# Altium PCB Group_2.PcbDoc (part 1 of 2)
Units mil, origin at the board's own origin, x right, y up, seen from the top; angles counter-clockwise.
Board outline 3460 x 5000 mil, 2 copper layers (Top Layer, Bottom Layer); 164 components, 77 nets, 434 pads, 114 vias.
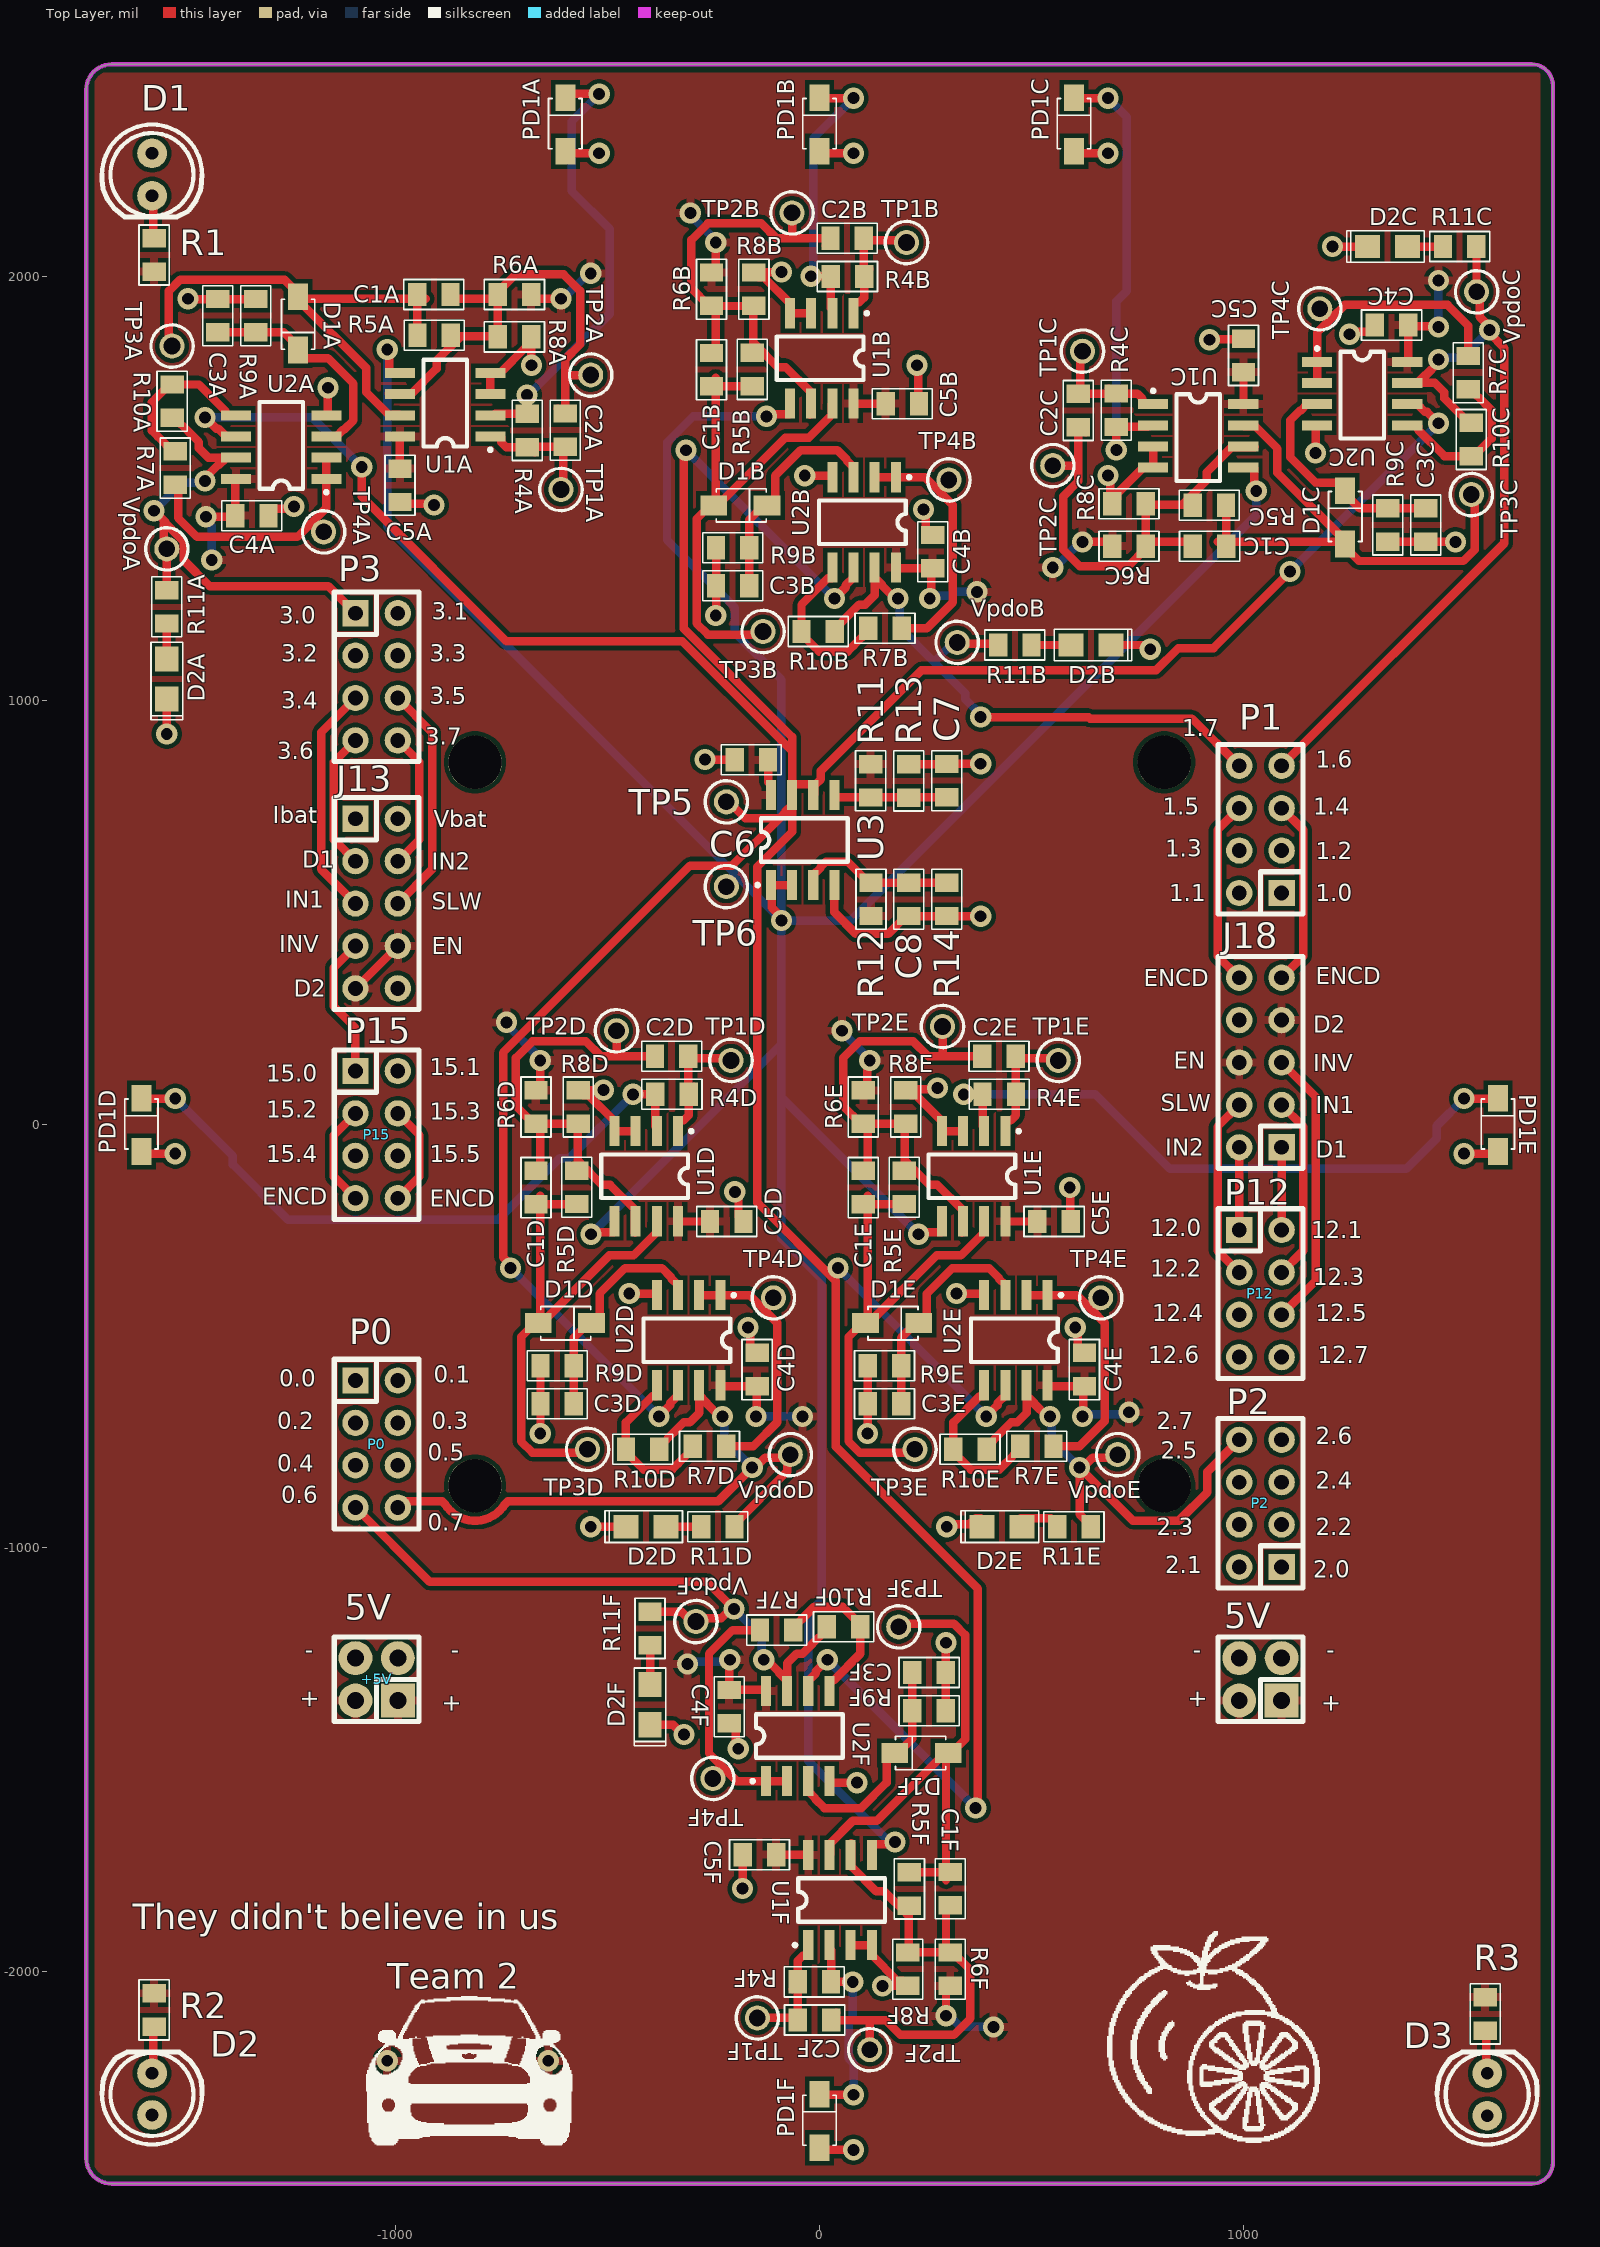
[diagram p0: Top Layer view]
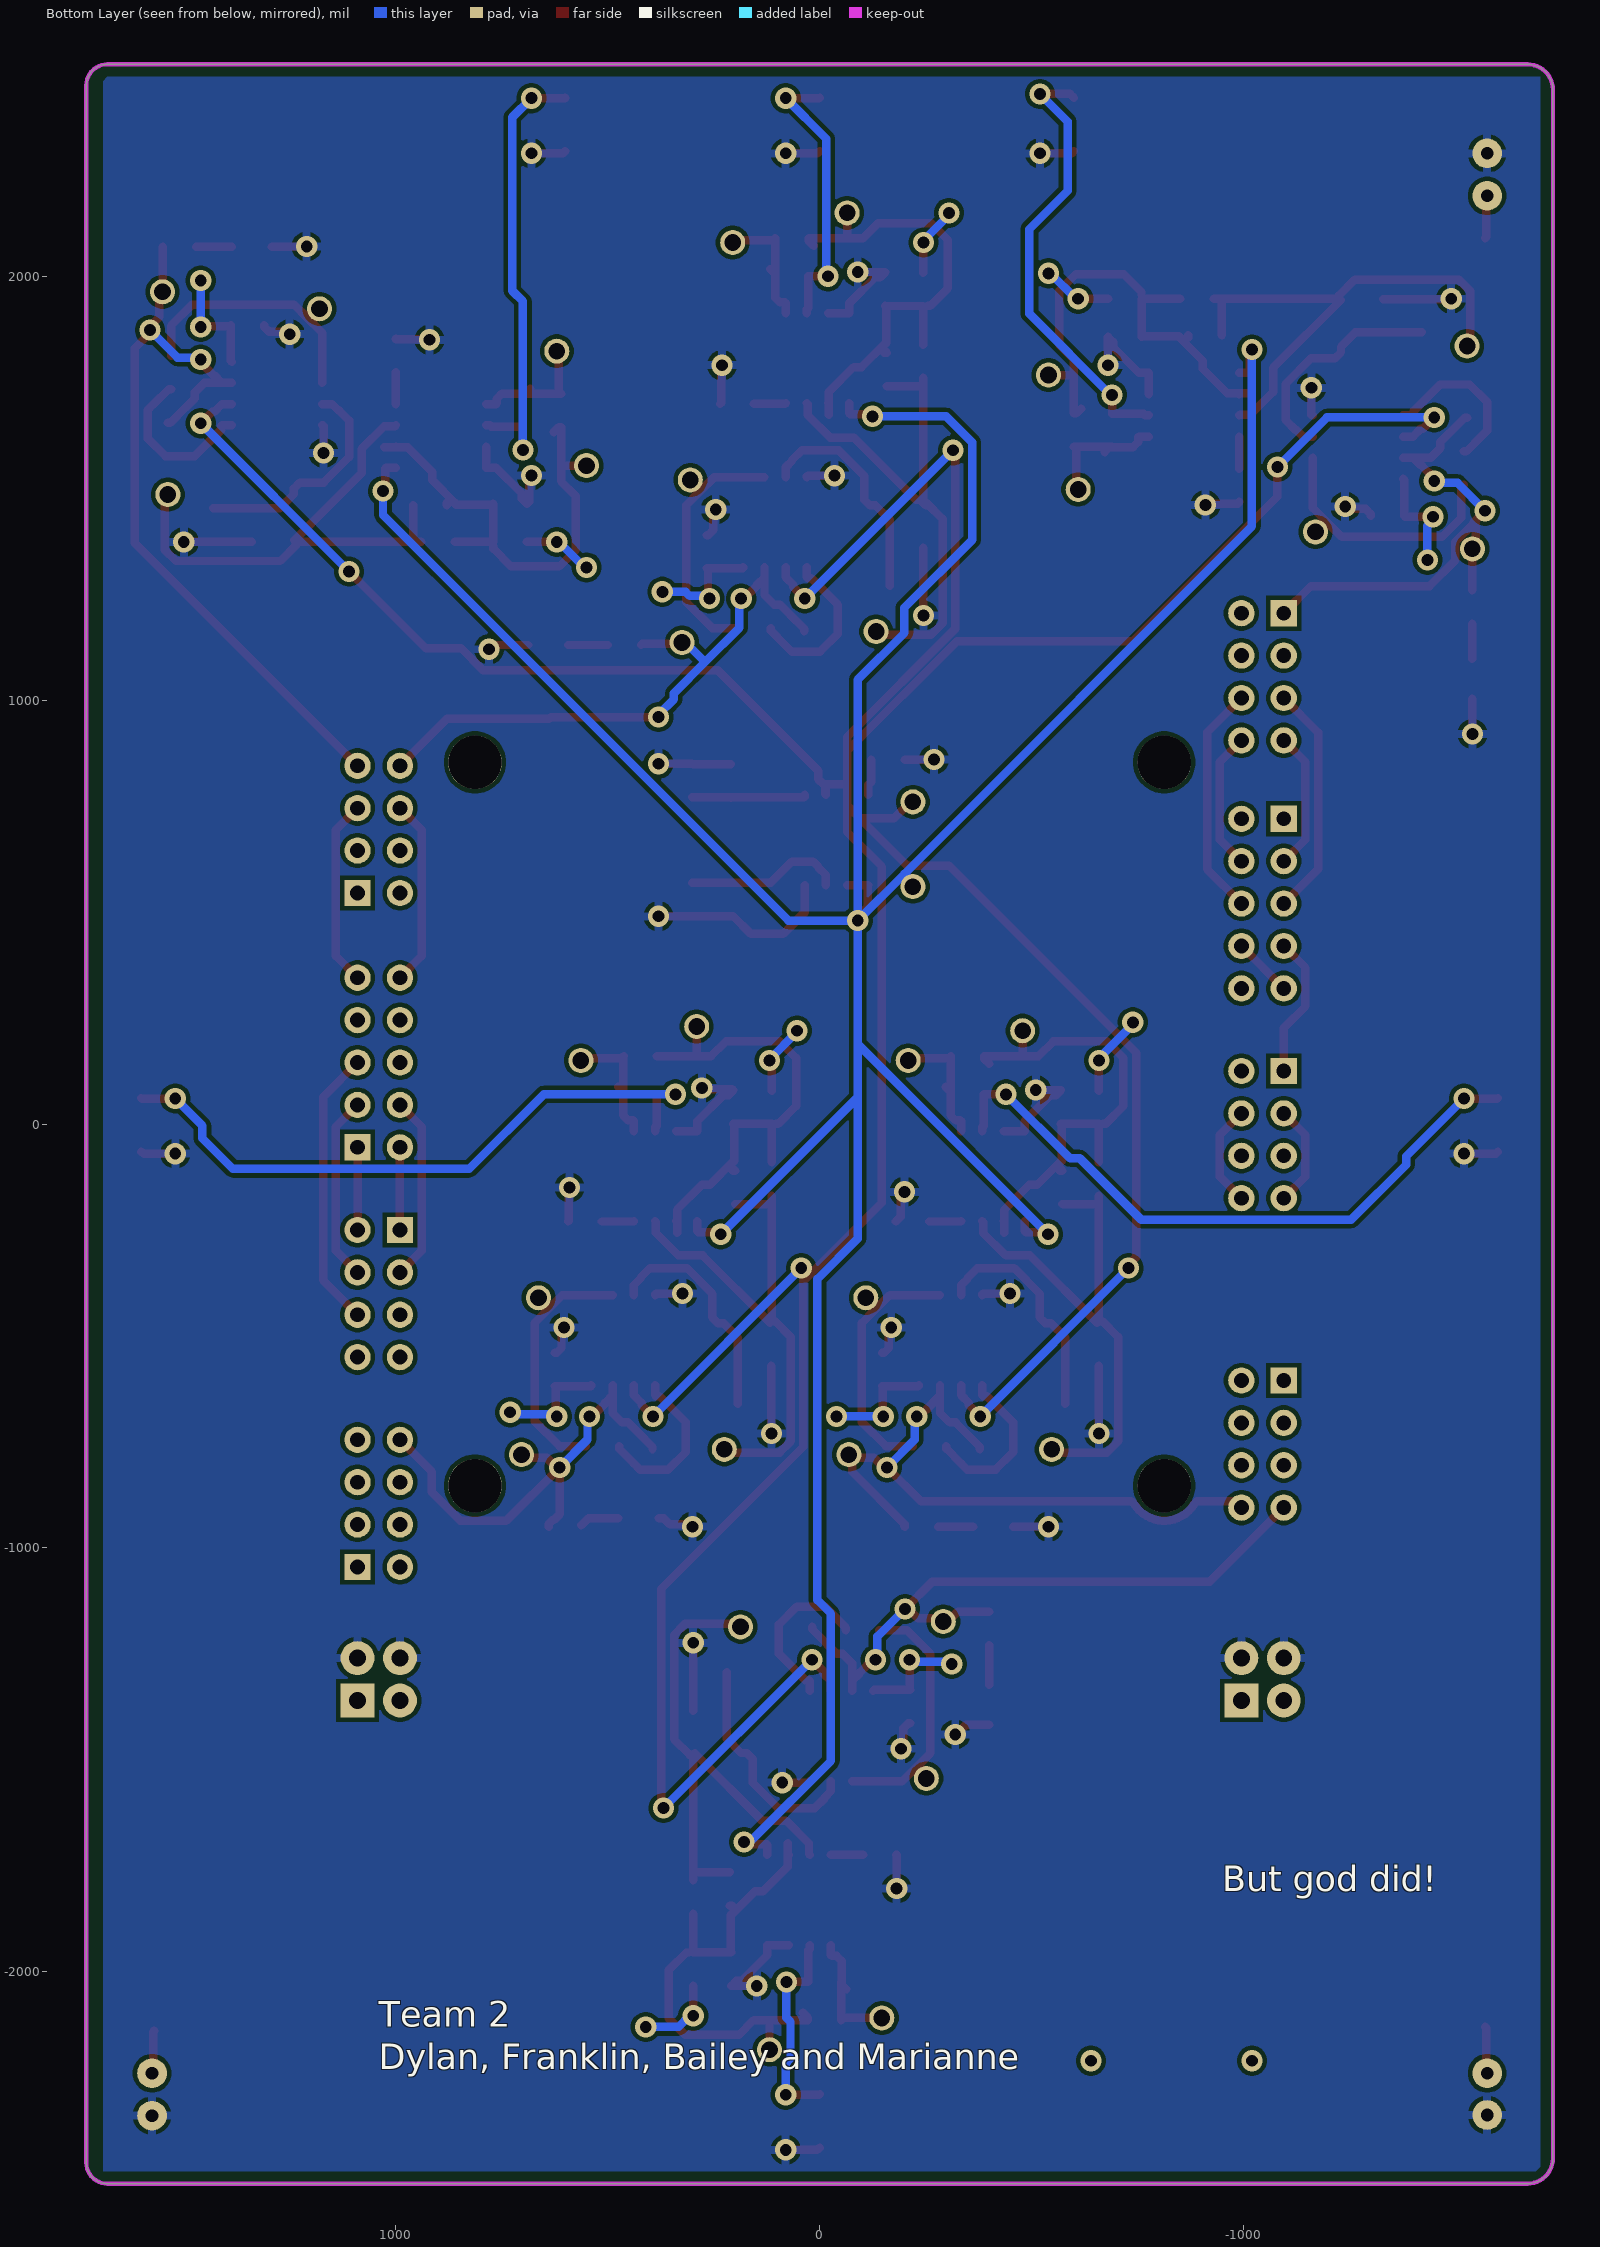
[diagram p1: Bottom Layer view, seen from below]

## Layer stack, top to bottom
Top Solder: solder mask 0.4, Solder Resist, Dk 3.5
Top Layer: signal copper 1.4
Dielectric1: dielectric 12.6, FR-4, Dk 4.8
Bottom Layer: signal copper 1.4
Bottom Solder: solder mask 0.4, Solder Resist, Dk 3.5

## Board outline
-1730,-2440 ccw(c-1670,-2440) -1670,-2500 1680,-2500 ccw(c1680,-2450) 1730,-2450 1730,2450 ccw(c1680,2450) 1680,2500 -1670,2500 ccw(c-1670,2440) -1730,2440

## Design rules (kind name [scope] priority, off if disabled: settings)
Clearance [All] p1: gap=10 ignorepadtopadclearanceinfootprint=FALSE except(0: Arc-Hole Track-Hole SMDPad-Hole THPad-Hole Via-Hole Fill-Hole Poly-Hole Region-Hole Text-Hole)
HoleSize [All] p1: absolutevalues=TRUE maxlimit=126 minlimit=1 maxpercent=80.000 minpercent=20.000
MinimumSolderMaskSliver [All] p1: minsoldermaskwidth=3.94
PolygonConnect [All] p1: connectstyle=Relief reliefconductorwidth=20 reliefentries=4 polygonreliefangle="90 Angle" airgapwidth=10
RoomDefinition cs301_Group2 [InComponentClass('cs301_Group2')] p1: confinementstyle=ConfineIn formatcopy=TRUE lockcomponents=FALSE outline -5118.11,-3656.69 -3118.11,-3656.69 -3118.11,-2656.69 -5118.11,-2656.69
RoomDefinition U_cs301_Group2_Sensing6 [InComponentClass('U_cs301_Group2_Sensing6')] p2: confinementstyle=ConfineIn formatcopy=TRUE lockcomponents=FALSE outline 398.2,-1053.86 -361.8,-1053.86 -361.8,-2243.86 398.2,-2243.86
RoomDefinition U_cs301_Group2_Sensing3 [InComponentClass('U_cs301_Group2_Sensing3')] p3: confinementstyle=ConfineIn formatcopy=TRUE lockcomponents=FALSE outline 1670,1273.17 1670,2033.17 490,2033.17 490,1273.17
RoomDefinition U_cs301_Group2_Offsets [InComponentClass('U_cs301_Group2_Offsets')] p4: confinementstyle=ConfineIn formatcopy=TRUE lockcomponents=FALSE outline 497.72,307.56 497.72,967.56 -532.28,967.56 -532.28,307.56
RoomDefinition U_cs301_Group2_Sensing4 [InComponentClass('U_cs301_Group2_Sensing4')] p5: confinementstyle=ConfineIn formatcopy=TRUE lockcomponents=FALSE outline -759.05,-900 0.95,-900 0.95,280 -759.05,280
RoomDefinition U_cs301_Group2_Sensing5 [InComponentClass('U_cs301_Group2_Sensing5')] p6: confinementstyle=ConfineIn formatcopy=TRUE lockcomponents=FALSE outline 13.17,-900 773.17,-900 773.17,290 13.17,290
RoomDefinition U_cs301_Group2_Sensing1 [InComponentClass('U_cs301_Group2_Sensing1')] p7: confinementstyle=ConfineIn formatcopy=TRUE lockcomponents=FALSE outline -1660,2046.83 -1660,1286.83 -480,1286.83 -480,2046.83
RoomDefinition U_cs301_Group2_Sensing2 [InComponentClass('U_cs301_Group2_Sensing2')] p8: confinementstyle=ConfineIn formatcopy=TRUE lockcomponents=FALSE outline -345,1029.44 415,1029.44 415,2209.44 -345,2209.44
RoutingVias [All] p1: holewidth=28 width=50 viastyle="Through Hole" minholewidth=28 minwidth=50 maxholewidth=28 maxwidth=50
SilkToSilkClearance [All] p1: silktosilkclearance=3.94
SilkToSolderMaskClearance SilkscreenOverComponentPads [IsPad] p1: minsilkscreentomaskgap=3.94 clearancetoexposedcopper=TRUE
SolderMaskExpansion [All] p1: expansion=4 istentingtop=FALSE
Width [All] p1: maxlimit=30 minlimit=10 preferedwidth=20 minimp=50.000000 maximp=50.000000 favimp=50.000000
26 further rules are at their usual default settings.

## Classes and differential pairs
component class U_cs301_Group2_Offsets: C6 C7 C8 R11 R12 R13 R14 TP5 TP6 U3
channel class cs301_Group2_Sensing: U_cs301_Group2_Sensing1 U_cs301_Group2_Sensing2 U_cs301_Group2_Sensing3 U_cs301_Group2_Sensing4 U_cs301_Group2_Sensing5 U_cs301_Group2_Sensing6
component class U_cs301_Group2_Sensing6: C1F C2F C3F C4F C5F D1F D2F PD1F R4F R5F R6F R7F R8F R9F R10F R11F TP1F TP2F TP3F TP4F U1F U2F VpdoF
component class U_cs301_Group2_Sensing5: C1E C2E C3E C4E C5E D1E D2E PD1E R4E R5E R6E R7E R8E R9E R10E R11E TP1E TP2E TP3E TP4E U1E U2E VpdoE
component class U_cs301_Group2_Sensing4: C1D C2D C3D C4D C5D D1D D2D PD1D R4D R5D R6D R7D R8D R9D R10D R11D TP1D TP2D TP3D TP4D U1D U2D VpdoD
component class U_cs301_Group2_Sensing3: C1C C2C C3C C4C C5C D1C D2C PD1C R4C R5C R6C R7C R8C R9C R10C R11C TP1C TP2C TP3C TP4C U1C U2C VpdoC
component class U_cs301_Group2_Sensing2: C1B C2B C3B C4B C5B D1B D2B PD1B R4B R5B R6B R7B R8B R9B R10B R11B TP1B TP2B TP3B TP4B U1B U2B VpdoB
component class U_cs301_Group2_Sensing1: C1A C2A C3A C4A C5A D1A D2A PD1A R4A R5A R6A R7A R8A R9A R10A R11A TP1A TP2A TP3A TP4A U1A U2A VpdoA

## Components (designator, comment, footprint, x,y, rotation, side; value= is the part's Value field where it differs from the comment)
5V "5V" IDC4 1090,-1360 r90 top locked
+5V "5V" IDC4 -995,-1360 r90 top locked
C1A "2.2n" "0805 CAP" -910,1956.83 r180 top (schematic designator C1)
C1B "2.2n" "0805 CAP" -255,1779.44 r270 top (schematic designator C1)
C1C "2.2n" "0805 CAP" 920,1363.17 r0 top (schematic designator C1)
C1D "2.2n" "0805 CAP" -669.05,-150 r270 top (schematic designator C1)
C1E "2.2n" "0805 CAP" 103.17,-150 r270 top (schematic designator C1)
C1F "2.2n" "0805 CAP" 308.2,-1803.86 r90 top (schematic designator C1)
C2A "470n" "0805 CAP" -600,1636.83 r90 top (schematic designator C2)
C2B "470n" "0805 CAP" 65,2089.44 r180 top (schematic designator C2)
C2C "470n" "0805 CAP" 610,1683.17 r270 top (schematic designator C2)
C2D "470n" "0805 CAP" -349.05,160 r180 top (schematic designator C2)
C2E "470n" "0805 CAP" 423.17,160 r180 top (schematic designator C2)
C2F "470n" "0805 CAP" -11.8,-2113.86 r0 top (schematic designator C2)
C3A "100n" "0805 CAP" -1420,1906.83 r270 top (schematic designator C3)
C3B "100n" "0805 CAP" -205,1269.44 r0 top (schematic designator C3)
C3C "100n" "0805 CAP" 1430,1413.17 r90 top (schematic designator C3)
C3D "100n" "0805 CAP" -619.05,-660 r0 top (schematic designator C3)
C3E "100n" "0805 CAP" 153.17,-660 r0 top (schematic designator C3)
C3F "100n" "0805 CAP" 258.2,-1293.86 r180 top (schematic designator C3)
C4A "100n" "0805 CAP" -1339.37,1435.24 r0 top (schematic designator C4)
C4B "100n" "0805 CAP" 266.58,1350.07 r90 top (schematic designator C4)
C4C "100n" "0805 CAP" 1349.37,1884.76 r180 top (schematic designator C4)
C4D "100n" "0805 CAP" -147.46,-579.37 r90 top (schematic designator C4)
C4E "100n" "0805 CAP" 624.76,-579.37 r90 top (schematic designator C4)
C4F "100n" "0805 CAP" -213.38,-1374.49 r270 top (schematic designator C4)
C5A "100n" "0805 CAP" -990,1506.83 r270 top (schematic designator C5)
C5B "100n" "0805 CAP" 195,1699.44 r0 top (schematic designator C5)
C5C "100n" "0805 CAP" 1000,1813.17 r90 top (schematic designator C5)
C5D "100n" "0805 CAP" -219.05,-230 r0 top (schematic designator C5)
C5E "100n" "0805 CAP" 553.17,-230 r0 top (schematic designator C5)
C5F "100n" "0805 CAP" -141.8,-1723.86 r180 top (schematic designator C5)
C6 "100n" "0805 CAP" -161.02,859.02 r180 top
C7 "100n" "0805 CAP" 300,810 r270 top
C8 "100n" "0805 CAP" 210,530 r90 top
D1 "LED" LED0.1/5MM#1 -1574.8,2189.76 r180 top locked
D1A "1N4148W-7-F" SOD123 -1230,1886.83 r270 top (schematic designator D1)
D1B "1N4148W-7-F" SOD123 -185,1459.44 r0 top (schematic designator D1)
D1C "1N4148W-7-F" SOD123 1240,1433.17 r90 top (schematic designator D1)
D1D "1N4148W-7-F" SOD123 -599.05,-470 r0 top (schematic designator D1)
D1E "1N4148W-7-F" SOD123 173.17,-470 r0 top (schematic designator D1)
D1F "1N4148W-7-F" SOD123 238.2,-1483.86 r180 top (schematic designator D1)
D2 "LED" LED0.1/5MM#2 -1574.8,-2239.37 r0 top locked
D2A "LTST-C170KGKT" "0805 LED" -1540,1050 r270 top (schematic designator D2)
D2B "LTST-C170KGKT" "0805 LED" 640,1130 r0 top (schematic designator D2)
D2C "LTST-C170KGKT" "0805 LED" 1340,2070 r180 top (schematic designator D2)
D2D "LTST-C170KGKT" "0805 LED" -410,-950 r180 top (schematic designator D2)
D2E "LTST-C170KGKT" "0805 LED" 430,-950 r180 top (schematic designator D2)
D2F "LTST-C170KGKT" "0805 LED" -400,-1370 r270 top (schematic designator D2)
D3 "LED" LED0.1/5MM#1 1574.8,-2239.37 r0 top locked
J13 "CON10" IDC10 -1095,720 r270 top locked
J18 "CON10" IDC10 1090,-55 r90 top locked
P0 "P0" idc8 -1095,-605 r270 top locked
P1 "P1" idc8 1090,545 r90 top locked
P2 "P2" idc8 1090,-1045 r90 top locked
P3 "P3" idc8 -1095,1205 r270 top locked
P12 "P12" idc8 990,-250 r270 top locked
P15 "P15" IDC8 -1095,125 r270 top locked
PD1A "Photodiode" SOD123 -600,2360 r90 top locked (schematic designator PD1)
PD1B "Photodiode" SOD123 0,2360 r90 top locked (schematic designator PD1)
PD1C "Photodiode" SOD123 600,2360 r90 top locked (schematic designator PD1)
PD1D "Photodiode" SOD123 -1600,0 r90 top locked (schematic designator PD1)
PD1E "Photodiode" SOD123 1600,0 r90 top locked (schematic designator PD1)
PD1F "Photodiode" SOD123 0,-2350 r90 top locked (schematic designator PD1)
R1 "*" "0805 RES" -1570,2050 r270 top
R2 "*" "0805 RES" -1570,-2090 r90 top
R3 "*" "0805 RES" 1570,-2099.37 r90 top
R4A "1M" "0805 RES" -690,1636.2 r90 top (schematic designator R4)
R4B "1M" "0805 RES" 65.63,1999.44 r180 top (schematic designator R4)
R4C "1M" "0805 RES" 700,1683.8 r270 top (schematic designator R4)
R4D "1M" "0805 RES" -348.42,70 r180 top (schematic designator R4)
R4E "1M" "0805 RES" 423.8,70 r180 top (schematic designator R4)
R4F "1M" "0805 RES" -12.43,-2023.86 r0 top (schematic designator R4)
R5A "470k" "0805 RES" -909.37,1860.54 r0 top (schematic designator R5)
R5B "470k" "0805 RES" -158.71,1780.07 r90 top (schematic designator R5)
R5C "470k" "0805 RES" 919.37,1459.46 r180 top (schematic designator R5)
R5D "470k" "0805 RES" -572.76,-149.37 r90 top (schematic designator R5)
R5E "470k" "0805 RES" 199.46,-149.37 r90 top (schematic designator R5)
R5F "470k" "0805 RES" 211.91,-1804.49 r270 top (schematic designator R5)
R6A "6.8k" "0805 RES" -720,1956.83 r0 top (schematic designator R6)
R6B "6.8k" "0805 RES" -255,1969.44 r90 top (schematic designator R6)
R6C "6.8k" "0805 RES" 730,1363.17 r180 top (schematic designator R6)
R6D "6.8k" "0805 RES" -669.05,40 r90 top (schematic designator R6)
R6E "6.8k" "0805 RES" 103.17,40 r90 top (schematic designator R6)
R6F "6.8k" "0805 RES" 308.2,-1993.86 r270 top (schematic designator R6)
R7A "470k" "0805 RES" -1520,1547.46 r270 top (schematic designator R7)
R7B "470k" "0805 RES" 154.37,1169.44 r0 top (schematic designator R7)
R7C "470k" "0805 RES" 1530,1772.54 r90 top (schematic designator R7)
R7D "470k" "0805 RES" -259.68,-760 r0 top (schematic designator R7)
R7E "470k" "0805 RES" 512.54,-760 r0 top (schematic designator R7)
R7F "470k" "0805 RES" -101.17,-1193.86 r180 top (schematic designator R7)
R8A "6.8k" "0805 RES" -720,1856.83 r180 top (schematic designator R8)
R8B "6.8k" "0805 RES" -155,1969.44 r270 top (schematic designator R8)
R8C "6.8k" "0805 RES" 730,1463.17 r0 top (schematic designator R8)
R8D "6.8k" "0805 RES" -569.05,40 r270 top (schematic designator R8)
R8E "6.8k" "0805 RES" 203.17,40 r270 top (schematic designator R8)
R8F "6.8k" "0805 RES" 208.2,-1993.86 r90 top (schematic designator R8)
R9A "470k" "0805 RES" -1330,1906.83 r270 top (schematic designator R9)
R9B "470k" "0805 RES" -205,1359.44 r0 top (schematic designator R9)
R9C "470k" "0805 RES" 1340,1413.17 r90 top (schematic designator R9)
R9D "470k" "0805 RES" -619.05,-570 r0 top (schematic designator R9)
R9E "470k" "0805 RES" 153.17,-570 r0 top (schematic designator R9)
R9F "470k" "0805 RES" 258.2,-1383.86 r180 top (schematic designator R9)
R10A "470k" "0805 RES" -1527.56,1705.17 r90 top (schematic designator R10)
R10B "470k" "0805 RES" -3.35,1161.88 r180 top (schematic designator R10)
R10C "470k" "0805 RES" 1537.56,1614.83 r270 top (schematic designator R10)
R10D "470k" "0805 RES" -417.39,-767.56 r180 top (schematic designator R10)
R10E "470k" "0805 RES" 354.83,-767.56 r180 top (schematic designator R10)
R10F "470k" "0805 RES" 56.55,-1186.3 r0 top (schematic designator R10)
R11 "100k" "0805 RES" 120.31,809.69 r270 top
R11A "330" "0805 RES" -1540,1220 r270 top (schematic designator R11)
R11B "330" "0805 RES" 460.63,1130 r0 top (schematic designator R11)
R11C "330" "0805 RES" 1510,2070 r180 top (schematic designator R11)
R11D "330" "0805 RES" -240,-950 r180 top (schematic designator R11)
R11E "330" "0805 RES" 600,-950 r180 top (schematic designator R11)
R11F "330" "0805 RES" -400,-1190 r270 top (schematic designator R11)
R12 "100k" "0805 RES" 121.26,530 r90 top
R13 "390k" "0805 RES" 210,809.37 r90 top
R14 "100k" "0805 RES" 300,530 r270 top
TP1A "5003" TP_TH -610,1496.83 r270 top (schematic designator TP1)
TP1B "5003" TP_TH 205,2079.44 r0 top (schematic designator TP1)
TP1C "5003" TP_TH 620,1823.17 r90 top (schematic designator TP1)
TP1D "5003" TP_TH -209.05,150 r0 top (schematic designator TP1)
TP1E "5003" TP_TH 563.17,150 r0 top (schematic designator TP1)
TP1F "5003" TP_TH -146.8,-2108.86 r180 top (schematic designator TP1)
TP2A "5003" TP_TH -540,1766.83 r90 top (schematic designator TP2)
TP2B "5003" TP_TH -65,2149.44 r180 top (schematic designator TP2)
TP2C "5003" TP_TH 550,1553.17 r270 top (schematic designator TP2)
TP2D "5003" TP_TH -479.05,220 r180 top (schematic designator TP2)
TP2E "5003" TP_TH 290,230 r180 top (schematic designator TP2)
TP2F "5003" TP_TH 118.2,-2183.86 r0 top (schematic designator TP2)
TP3A "5003" TP_TH -1527.56,1835.17 r0 top (schematic designator TP3)
TP3B "5003" TP_TH -133.35,1161.88 r90 top (schematic designator TP3)
TP3C "5003" TP_TH 1537.56,1484.83 r180 top (schematic designator TP3)
TP3D "5003" TP_TH -547.39,-767.56 r90 top (schematic designator TP3)
TP3E "5003" TP_TH 224.83,-767.56 r90 top (schematic designator TP3)
TP3F "5003" TP_TH 186.55,-1186.3 r270 top (schematic designator TP3)
TP4A "5003" TP_TH -1170,1396.83 r270 top (schematic designator TP4)
TP4B "5003" TP_TH 305,1519.44 r0 top (schematic designator TP4)
TP4C "5003" TP_TH 1180,1923.17 r90 top (schematic designator TP4)
TP4D "5003" TP_TH -109.05,-410 r0 top (schematic designator TP4)
TP4E "5003" TP_TH 663.17,-410 r0 top (schematic designator TP4)
TP4F "5003" TP_TH -251.8,-1543.86 r180 top (schematic designator TP4)
TP5 "5003" TP_TH -220,760 r180 top
TP6 "5003" TP_TH -220,560 r180 top
U1A "LM358" "SO - 8" -883.14,1696.83 r180 top (schematic designator U1)
U1B "LM358" "SO - 8" 5,1806.3 r270 top (schematic designator U1)
U1C "LM358" "SO - 8" 893.14,1623.17 r0 top (schematic designator U1)
U1D "LM358" "SO - 8" -409.05,-123.14 r270 top (schematic designator U1)
U1E "LM358" "SO - 8" 363.17,-123.14 r270 top (schematic designator U1)
U1F "LM358" "SO - 8" 48.2,-1830.72 r90 top (schematic designator U1)
U2A "LM358" "SO - 8" -1270,1596.83 r180 top (schematic designator U2)
U2B "LM358" "SO - 8" 105,1419.44 r270 top (schematic designator U2)
U2C "LM358" "SO - 8" 1280,1723.17 r0 top (schematic designator U2)
U2D "LM358" "SO - 8" -309.05,-510 r270 top (schematic designator U2)
U2E "LM358" "SO - 8" 463.17,-510 r270 top (schematic designator U2)
U2F "LM358" "SO - 8" -51.8,-1443.86 r90 top (schematic designator U2)
U3 "LM358" "SO - 8" -40,670 r90 top
VpdoA "5003" TP_TH -1540,1356.83 r0 top (schematic designator Vpdo)
VpdoB "5003" TP_TH 324.61,1136.11 r90 top (schematic designator Vpdo)
VpdoC "5003" TP_TH 1550,1963.17 r180 top (schematic designator Vpdo)
VpdoD "5003" TP_TH -69.05,-780 r90 top (schematic designator Vpdo)
VpdoE "5003" TP_TH 703.17,-780 r90 top (schematic designator Vpdo)
VpdoF "5003" TP_TH -291.8,-1173.86 r270 top (schematic designator Vpdo)

## Footprints (in the part's own frame and the unit in brackets; to place one, negate y for a bottom-side part, rotate by r counter-clockwise, add the part's x,y. Pads: shape width x height; smd on the part's side, far side on the other; paste and mask are expansions set on the pad)
"0805 CAP" [mm] "http://www.digikey.co.nz/Web%20Export/Supplier%20Content/Vishay_8026/PDF/VishayBeyschlag_SolderPad.pdf?redirected=1 with dimension G modified by +0.25mm"
  rect 1.1x1.4 smd: 1(-1,0) 2(1,0)
  silkscreen extent -1.8,-0.9 1.8,0.9, body extent -1.04,-0.66 1.04,0.66, height 0.61
"0805 LED" [mm] "RED AS AlGaAs SMD LED, Body; 2mm x 1.25 mm (LxW)"
  rect 1.5x1.4 smd: 1(-1.2,0) 2(1.2,0)
  silkscreen extent -2.2,-0.95 2.45,0.95, body extent -1,-0.63 1,0.63, height 1.1
"0805 RES" [mm] "http://www.digikey.co.nz/Web%20Export/Supplier%20Content/Vishay_8026/PDF/VishayBeyschlag_SolderPad.pdf?redirected=1 with dimension G modified by +0.25mm"
  rect 1.1x1.4 smd: 1(-1,0) 2(1,0)
  silkscreen extent -1.8,-0.9 1.8,0.9, body extent -1.04,-0.66 1.04,0.66, height 0.61
IDC4 [mil]
  rect 80x80 hole 40: 1(0,0)
  round 80 hole 40: 2(0,100) 3(100,0) 4(100,100)
  silkscreen extent -50,-50 150,150
idc8 [mil]
  rect 62x62 hole 35: 1(0,0)
  round 62 hole 35: 2(0,100) 3(100,0) 4(100,100) 5(200,0) 6(200,100) 7(300,0) 8(300,100)
  silkscreen extent -50,-50 350,150
IDC8 [mil]
  rect 62x62 hole 35: 1(0,0)
  round 62 hole 35: 2(0,100) 3(100,0) 4(100,100) 5(200,0) 6(200,100) 7(300,0) 8(300,100)
  silkscreen extent -50,-50 350,150
IDC10 [mil]
  rect 62x62 hole 35: 1(0,0)
  round 62 hole 35: 2(0,100) 3(100,0) 4(100,100) 5(200,0) 6(200,100) 7(300,0) 8(300,100) 9(400,0) 10(400,100)
  silkscreen extent -50,-50 450,150
LED0.1/5MM#1 [mil]
  round 70 hole 30: A(0,0) K(0,-100)
  silkscreen extent -118,-168 118,50
LED0.1/5MM#2 [mil]
  round 70 hole 30: A(0,0) K(0,-98.43)
  silkscreen extent -118,-168 118,50
"SO - 8" [mm]
  rect 1.8x0.6 smd: 1(-2.7,1.905) 2(-2.7,0.635) 3(-2.7,-0.635) 4(-2.7,-1.905) 5(2.7,-1.905) 6(2.7,-0.635) 7(2.7,0.635) 8(2.7,1.905)
  silkscreen extent -2.8,-2.7 1.3,2.8, body extent -3.1,-2.5 3.1,2.5, height 1.8
SOD123 [mm] "SOD-123; 2 Leads; Body 2.7 x 1.6 mm, (LxW)"
  rect 1.6x1.2 smd: 1(-1.65,0) 2(1.55,0)
  silkscreen extent -1.5,-1 1.5,1, body extent -1.8,-0.86 1.8,0.86, height 1.21
TP_TH [mm] "Test Point, Through Hole, Dia 2.54mm"
  round 1.5 hole 1: 1(0,0)
  silkscreen extent -1.27,-1.27 1.27,1.27, body extent -1.27,-1.27 1.27,1.27, height 4.57

## Part data
5V +5V: library part CON4, "Connector"
C1A C1B C1C C1D C1E C1F C2A C2B C2C C2D C2E C2F C3A C3B C3C C3D C3E C3F C4A C4B C4C C4D C4E C4F C5A C5B C5C C5D C5E C5F C6 C7 C8: library part CerCap_SMT_0805, "SMT ceramic capacitor 0805 size"
D1A D1B D1C D1D D1E D1F: library part ES1H_SMT_DO214, "1N4148 100V 200mA SOD-123 diode", Base Part Number=1N4148, Capacitance @ Vr, F="4pF @ 0V, 1MHz", Current - Average Rectified (Io)=200mA, Manufacturer="ON Semiconductor", Manufacturer Part Number=1N4148TR, Operating Temperature - Junction="-65°C ~ 175°C", Package / Case="DO-204AH, DO-35, Axial", Supplier Device Package=DO-35, Supplier Part Number 1=1N4148FSCT-ND, Category="Discrete Semiconductor Products", ComponentLink1Description=https://www.fairchildsemi.com/datasheets/1N/1N914.pdf, ComponentLink1URL=https://www.fairchildsemi.com/datasheets/1N/1N914.pdf, Diode Type=Standard, Mounting Type="Through Hole", Part Status=Active, Pricing 1="1=0.16, 10=0.109, 100=0.0592, 500=0.03648, 1000=0.02488 (NZD)", RoHS="RoHS Compliant", Speed="Small Signal =< 200mA (Io), Any Speed", Stock 1=1658049, Supplier 1=Digi-Key
D2A D2B D2C D2D D2E D2F: library part LED_SMT_0805, "SMT LED 0805 size", Color=Green, Current - Test=20mA, Lens Color=Colorless, Manufacturer="Lite-On Inc.", Millicandela Rating=35mcd, Package / Case="0805 (2012 Metric)", Supplier Part Number 1=160-1414-1-ND, Voltage - Forward (Vf) (Typ)=2V, Category=Optoelectronics, ComponentLink1Description=http://optoelectronics.liteon.com/upload/download/DS22-2000-073/LTST-C170KGKT.pdf, ComponentLink1URL=http://optoelectronics.liteon.com/upload/download/DS22-2000-073/LTST-C170KGKT.pdf, Features=-, Height (Max)=1.10mm, Lens Style/Size="Rectangle with Flat Top, 1.40mm x 1.25mm", Lens Transparency=Clear, Manufacturer Part Number=LTST-C170KGKT, Mounting Type="Surface Mount", Packaging="Cut Tape (CT)", Part Status=Active, Pricing 1="1=0.62, 10=0.459, 25=0.338, 100=0.2415, 250=0.16416, 500=0.14486, 1000=0.11347 (NZD)", RoHS="RoHS Compliant", Size / Dimension="2.00mm L x 1.25mm W", Stock 1=503069, Supplier 1=Digi-Key, Viewing Angle=130°, Wavelength - Dominant=571nm, Wavelength - Peak=574nm
J13 J18: "Connector"
P0 P1 P2 P3: library part CON8, "Connector"
P12 P15: library part CON8_1, "Connector"
PD1A PD1B PD1C PD1D PD1E PD1F: library part 1N4148_SMT_SOD123, "DIODE GEN PURP 100V 300MA SOD123", Base Part Number=1N4148W, Capacitance @ Vr, F="2pF @ 0V, 1MHz", Current - Average Rectified (Io)=150mA, Manufacturer="Diodes Incorporated", Manufacturer Part Number=1N4148W-13-F, Operating Temperature - Junction="-65°C ~ 150°C", Package / Case=SOD-123, Supplier Part Number 1=1N4148W-13FDICT-ND, Category="Discrete Semiconductor Products", ComponentLink1Description=https://www.diodes.com/assets/Datasheets/ds30086.pdf, ComponentLink1URL=https://www.diodes.com/assets/Datasheets/ds30086.pdf, Diode Type=Standard, Mounting Type="Surface Mount", Packaging="Cut Tape (CT)", Part Status=Active, Pricing 1="1=0.33, 10=0.292, 100=0.1586, 500=0.0976, 1000=0.06656 (NZD)", RoHS="RoHS Compliant", Speed="Small Signal =< 200mA (Io), Any Speed", Stock 1=5282, Supplier 1=Digi-Key, Supplier Device Package=SOD-123
R1 R2 R3 R4A R4B R4C R4D R4E R4F R5A R5B R5C R5D R5E R5F R6A R6B R6C R6D R6E R6F R7A R7B R7C R7D R7E R7F R8A R8B R8C R8D R8E R8F R9A R9B R9C R9D R9E R9F R10A R10B R10C R10D R10E R10F R11 R11A R11B R11C R11D R11E R11F R12 R13 R14: library part Res_SMT_0805, "0805 resistor", ComponentLink1Description=https://nz.mouser.com/datasheet/2/315/AOA0000C304-1149620.pdf, LatestRevisionDate=17-Jul-2002, LatestRevisionNote="Re-released for DXP Platform.", PackageReference=AXIAL-0.4, Published=8-Jun-2000, Publisher="Altium Limited"
TP1A TP1B TP1C TP1D TP1E TP1F TP2A TP2B TP2C TP2D TP2E TP2F TP3A TP3B TP3C TP3D TP3E TP3F TP4A TP4B TP4C TP4D TP4E TP4F TP5 TP6 VpdoA VpdoB VpdoC VpdoD VpdoE VpdoF: library part TestPoint, "Test Point, Orange, 1-Pin THD, RoHS", Forward Current="3 A", Forward Voltage="1.08 V", Max Operating Temperature="150 degC", Max Surge Current="80 A", Min Operating Temperature="-65 degC", Package Quantity=500, Peak Reverse Current="600 uA", ComponentLink1Description="Manufacturer URL", ComponentLink1URL=http://www.keyelco.com/, ComponentLink2Description=Datasheet, ComponentLink2URL=http://keyelco.com/userAssets/file/M65p56.pdf, DatasheetVersion=Jun-15, Diameter="5.3 mm", Height="0.25 inch", Length="9.5 mm", Mount="Through Hole", PackageDescription="1-Pin Through Hole Device, Dia 2.54 mm", PackageReference=5003, Packaging=Bulk, Pins=2, Radiation Hardening=No, REACH SVHC="No SVHC", RoHSCompliant=true, Weight="0.01 lb", Width="0.25 inch"
U1A U1B U1C U1D U1E U1F U2A U2B U2C U2D U2E U2F U3: library part LM358_SMT_SOIC8, "IC OPAMP 8SOIC", Supplier Part Number 1=296-1014-1-ND, ComponentLink1Description=http://www.ti.com/lit/ds/symlink/tlc080a.pdf, ComponentLink1URL=http://www.ti.com/lit/ds/symlink/tlc080a.pdf, Supplier 1=Digi-Key

## Free pads (board coordinates)
  round 125.98 hole 125.98 unplated: 1(-813,-853) 1(-813,853) 1(813,-853) 1(813,853)

## Via types
v1: diameter 50, hole 28, Top Layer to Bottom Layer, 114 vias

## Nets (pads, with @x,y where several pads share a name; then routed paths per layer and width w, separated by ;. In a path a pad name is that pad's centre, name@x,y a point inside that pad or via, vN(x,y) a via of type N, cw(c..) or ccw(c..) an arc to the next point about the centre after c; other vN are vias at no path point)
GND: 5V.3 5V.4 +5V.3 +5V.4 C3A.1 C3B.1 C3C.1 C3D.1 C3E.1 C3F.1 C4A.2 C4B.2 C4C.2 C4D.2 C4E.2 C4F.2 C5A.2 C5B.2 C5C.2 C5D.2 C5E.2 C5F.2 C6.2 C7.1 C8.1 D1.K D2.K D2A.2 D2B.2 D2C.2 D2D.2 D2E.2 D2F.2 D3.K PD1A.1 PD1B.1 PD1C.1 PD1D.1 PD1E.1 PD1F.1 R8A.1 R8B.1 R8C.1 R8D.1 R8E.1 R8F.1 R9A.1 R9B.1 R9C.1 R9D.1 R9E.1 R9F.1 R13.2 R14.2 U1A.3 U1A.4 U1B.3 U1B.4 U1C.3 U1C.4 U1D.3 U1D.4 U1E.3 U1E.4 U1F.3 U1F.4 U2A.4 U2B.4 U2C.4 U2D.4 U2E.4 U2F.4 U3.4 | length 5468.1
  Top Layer w20: PD1D.1@-1600,-64.96 -1594.96,-70 v1(-1520,-70) ; v1(-1540,920) D2A.2@-1540,1002.76 ; v1@-1480,1946.83 -1479.37,1946.2 C3A.1@-1420,1946.2 R9A.1@-1330,1946.2 ; C4A.2@-1300,1435.24 -1300,1439.43 -1288.35,1451.09 -1245.74,1451.09 v1(-1240,1456.83) ; U2A.4@-1163.7,1671.83 -1161.81,1671.83 -1160,1673.64 v1(-1160,1736.83) ; C5A.2@-990,1467.46 -986.27,1463.73 -913.73,1463.73 v1(-910,1460) ; U1A.3@-776.84,1721.83 U1A.4@-776.84,1771.83 -753.22,1771.83 -692.28,1832.77 -692.28,1845.17 R8A.1@-680.63,1856.83 -680.31,1856.51 -680.31,1790.31 v1(-680,1790) ; v1@-659.05,-720 -658.42,-719.37 C3D.1@-658.42,-660 R9D.1@-658.42,-570 ; PD1A.1@-600,2295.04 -594.96,2290 v1(-520,2290) ; v1(-540,-950) D2D.2@-457.24,-950 ; v1(-510,80) -510.32,79.68 -568.73,79.68 R8D.1@-569.05,79.37 -557.39,67.72 -544.99,67.72 -484.05,6.78 U1D.4@-484.05,-16.84 U1D.3@-434.05,-16.84 ; v1(-449.05,-400) -385.86,-400 -384.05,-401.81 U2D.4@-384.05,-403.7 ; D2F.2@-400,-1417.24 -345.57,-1417.24 -322.82,-1440 v1(-320,-1440) ; v1(-270,860) -269.51,859.51 -200.88,859.51 C6.2@-200.39,859.02 ; v1@-245,1209.44 -244.37,1210.07 C3B.1@-244.37,1269.44 R9B.1@-244.37,1359.44 ; C4F.2@-213.38,-1413.86 -209.19,-1413.86 -197.54,-1425.51 -197.54,-1468.12 v1(-191.8,-1473.86) ; v1(-200,-160) -200,-168.12 -191.33,-176.79 -191.33,-218.35 C5D.2@-179.68,-230 ; v1(-181.8,-1803.86) -181.48,-1803.54 -181.48,-1724.17 C5F.2@-181.17,-1723.86 ; v1(-169.05,-480) -163.31,-485.74 -163.31,-528.35 -151.65,-540 C4D.2@-147.46,-540 ; v1(-90,2010) -90.59,2009.41 -154.41,2009.41 R8B.1@-155,2008.81 -143.35,1997.16 -130.94,1997.16 -70,1936.22 U1B.4@-70,1912.6 U1B.3@-20,1912.6 ; v1(-35,1529.44) 28.19,1529.44 30,1527.63 U2B.4@30,1525.74 ; PD1F.1@0,-2414.96 5.04,-2420 v1(80,-2420) ; PD1B.1@0,2295.04 5.04,2290 v1(80,2290) ; U2F.4@23.2,-1550.16 23.2,-1552.05 25.01,-1553.86 v1(88.2,-1553.86) ; U3.4@35,563.7 35,499.39 85.42,448.98 162.44,448.98 204.09,490.63 C8.1@210,490.63 R14.2@300,490.63 300.31,490.31 379.69,490.31 v1(380,490) ; U1F.3@73.2,-1937.01 U1F.4@123.2,-1937.01 123.2,-1960.64 184.14,-2021.58 196.55,-2021.58 R8F.1@208.2,-2033.23 207.89,-2033.54 148.52,-2033.54 v1(148.2,-2033.86) ; v1@113.17,-720 113.8,-719.37 C3E.1@113.8,-660 R9E.1@113.8,-570 ; R13.2@210,848.74 210.31,849.06 299.68,849.06 C7.1@300,849.37 300.31,849.69 379.68,849.69 v1(380,850) ; v1(230,1790) 232.18,1787.81 232.18,1701.63 C5B.2@234.37,1699.44 ; v1(245,1449.44) 250.74,1443.7 250.74,1401.1 262.39,1389.44 C4B.2@266.58,1389.44 ; v1(277.86,84.69) 275.2,82.03 205.83,82.03 R8E.1@203.17,79.37 214.83,67.72 227.23,67.72 288.17,6.78 U1E.4@288.17,-16.84 U1E.3@338.17,-16.84 ; R9F.1@297.57,-1383.86 C3F.1@297.57,-1293.86 297.57,-1234.49 v1@298.2,-1233.86 ; v1(300,-950) 305.74,-944.26 353.86,-944.26 368.12,-930 D2E.2@380,-930 ; v1(323.17,-400) 386.36,-400 388.17,-401.81 U2E.4@388.17,-403.7 ; v1(590,-150) 591.27,-151.27 591.27,-228.73 C5E.2@592.54,-230 ; PD1C.1@600,2295.04 605.04,2290 v1(680,2290) ; v1(603.17,-480) 608.91,-485.74 608.91,-528.35 620.57,-540 C4E.2@624.76,-540 ; v1(680,1530) 685.31,1524.69 685.31,1468.49 R8C.1@690.63,1463.17 702.28,1474.83 702.28,1487.23 763.22,1548.17 U1C.4@786.84,1548.17 U1C.3@786.84,1598.17 ; D2B.2@687.24,1130 761.88,1130 771.88,1120 v1(780,1120) ; v1(920,1850) 921.27,1851.27 998.73,1851.27 C5C.2@1000,1852.54 ; v1(1170,1583.17) 1170,1646.36 1171.81,1648.17 U2C.4@1173.7,1648.17 ; v1(1210,2070) D2C.2@1292.76,2070 ; v1(1250,1863.17) 1255.74,1868.91 1298.35,1868.91 1310,1880.57 C4C.2@1310,1884.76 ; R9C.1@1340,1373.8 C3C.1@1430,1373.8 1489.37,1373.8 v1@1490,1373.17 ; v1(1520,-70) 1594.96,-70 PD1E.1@1600,-64.96
  other v1: 298.2,-1223.86 -659.05,-730 113.17,-730 -245,1199.44 1500,1373.17 -1490,1946.83
LD1: J13.3 P3.7 | length 327.2
  Top Layer w20: J13.3@-1095,620 -1146,671 -1146,854 P3.7@-1095,905
LENCDA: P15.3 P15.7 | length 242.2
  Top Layer w20: P15.7@-1095,-175 -1146,-124 -1146,-26 P15.3@-1095,25
LENCDB: P15.4 P15.8 | length 242.2
  Top Layer w20: P15.8@-995,-175 -944,-124 -944,-26 P15.4@-995,25
LIN1: J13.5 P3.5 | length 552.1
  Top Layer w20: J13.5@-1095,520 -1176,601 -1176,924 P3.5@-1095,1005
LIN2: J13.4 P3.8 | length 327.2
  Top Layer w20: J13.4@-995,620 -944,671 -944,854 P3.8@-995,905
LINV: J13.7 P15.1 | length 337.2
  Top Layer w20: P15.1@-1095,125 -1095,226.32 -1146,277.32 -1146,369 J13.7@-1095,420
LSLEW: J13.6 P3.6 | length 552.1
  Top Layer w20: J13.6@-995,520 -914,601 -914,924 P3.6@-995,1005
NetC1A_1: C1A.1 C2A.2 R5A.2 R6A.1 R8A.2 TP2A.1 U1A.6 | length 1125.6
  Top Layer w20: U1A.6@-1016.78,1723.64 -991.25,1723.64 U1A.6@-989.44,1721.83 -987.63,1723.64 -962.1,1723.64 -903.69,1782.05 -903.69,1800.94 R5A.2@-850,1854.63 ; R5A.2@-870,1854.63 R5A.2@-870,1860.54 R5A.2@-868.14,1858.68 ; C1A.1@-850.63,1946.83 R6A.1@-765.91,1946.83 ; -848.14,1858.68 -761.23,1858.68 R8A.2@-759.69,1857.14 ; R6A.1@-759.69,1946.51 R8A.2@-759.69,1857.14 ; R8A.2@-759.37,1856.83 R8A.2@-759.69,1857.14 ; R6A.1@-759.37,1956.83 -759.37,1962.73 -717.72,2004.39 -603.92,2004.39 -565,1965.47 -565,1839.16 -600,1804.16 -600,1766.83 ; C2A.2@-617.56,1687.85 -605.91,1676.2 C2A.2@-600,1676.2 -600,1766.83 ; TP2A.1@-540,1766.83 -600,1766.83
NetC1A_2: C1A.2 D1A.1 R5A.1 TP3A.1 U1A.7 | length 1245
  Top Layer w20: TP3A.1@-1527.56,1835.17 -1535,1842.61 -1535,1965.47 -1508.64,1991.83 -1262.17,1991.83 -1225.04,1954.7 -1225.04,1946.83 C1A.2@-929.37,1946.83 ; D1A.1@-1228.98,1942.89 -1070,1783.91 -1070,1726.83 -1016.81,1673.64 -991.25,1673.64 U1A.7@-989.44,1671.83 ; C1A.2@-949.37,1946.83 -949.06,1946.51 -949.06,1860.85 R5A.1@-948.74,1860.54
NetC1B_1: C1B.1 C2B.2 R5B.2 R6B.1 R8B.2 TP2B.1 U1B.6 | length 1125.6
  Top Layer w20: R6B.1@-255,1930.07 -260.91,1930.07 -302.56,1971.73 -302.56,2085.52 -263.64,2124.44 -137.33,2124.44 -102.33,2089.44 -65,2089.44 ; C1B.1@-245,1838.81 R6B.1@-245,1923.54 ; R6B.1@-244.69,1929.76 R8B.2@-155.32,1929.76 ; R5B.2@-156.86,1821.3 R5B.2@-158.71,1819.44 R5B.2@-152.81,1819.44 ; -156.86,1841.3 -156.86,1928.22 R8B.2@-155.32,1929.76 ; R8B.2@-155,1930.07 R8B.2@-155.32,1929.76 ; R5B.2@-152.81,1839.44 -99.12,1785.75 -80.23,1785.75 -21.81,1727.34 -21.81,1701.81 U1B.6@-20,1700 -21.81,1698.19 U1B.6@-21.81,1672.66 ; TP2B.1@-65,2149.44 -65,2089.44 ; C2B.2@13.98,2071.88 25.63,2083.54 C2B.2@25.63,2089.44 -65,2089.44
NetC1B_2: C1B.2 D1B.1 R5B.1 TP3B.1 U1B.7 | length 1254.3
  Top Layer w20: D1B.1@-249.96,1459.44 -236.34,1473.07 -226.93,1473.07 -80.56,1619.44 -25,1619.44 28.19,1672.63 28.19,1698.19 U1B.7@30,1700 ; C1B.2@-245,1760.07 C1B.2@-245,1740.07 ; R5B.1@-158.71,1740.7 -159.03,1740.39 -244.69,1740.39 C1B.2@-245,1740.07 ; TP3B.1@-133.35,1161.88 -140.79,1154.44 -263.64,1154.44 -290,1180.8 -290,1427.28 -252.87,1464.4 -245,1464.4 C1B.2@-245,1740.07
NetC1C_1: C1C.1 C2C.2 R5C.2 R6C.1 R8C.2 TP2C.1 U1C.6 | length 1125.6
  Top Layer w20: TP2C.1@550,1553.17 610,1553.17 ; C2C.2@627.56,1632.15 615.91,1643.8 C2C.2@610,1643.8 610,1553.17 ; R6C.1@769.37,1363.17 769.37,1357.27 727.72,1315.61 613.92,1315.61 575,1354.53 575,1480.84 610,1515.84 610,1553.17 ; R8C.2@769.37,1463.17 R8C.2@769.69,1462.86 ; R6C.1@769.69,1373.49 R8C.2@769.69,1462.86 ; R6C.1@775.91,1373.17 C1C.1@860.63,1373.17 ; 858.14,1461.32 771.23,1461.32 R8C.2@769.69,1462.86 ; R5C.2@860,1465.37 913.69,1519.06 913.69,1537.95 972.1,1596.36 997.63,1596.36 U1C.6@999.44,1598.17 1001.25,1596.36 U1C.6@1026.78,1596.36 ; R5C.2@878.14,1461.32 R5C.2@880,1459.46 R5C.2@880,1465.37
NetC1C_2: C1C.2 D1C.1 R5C.1 TP3C.1 U1C.7 | length 1245
  Top Layer w20: C1C.2@939.37,1373.17 1235.04,1373.17 1235.04,1365.3 1272.17,1328.17 1518.64,1328.17 1545,1354.53 1545,1477.39 TP3C.1@1537.56,1484.83 ; R5C.1@958.74,1459.46 959.06,1459.15 959.06,1373.49 C1C.2@959.37,1373.17 ; U1C.7@999.44,1648.17 1001.25,1646.36 1026.81,1646.36 1080,1593.17 1080,1536.09 D1C.1@1238.98,1377.11
NetC1D_1: C1D.1 C2D.2 R5D.2 R6D.1 R8D.2 TP2D.1 U1D.6 | length 1125.6
  Top Layer w20: R6D.1@-669.05,0.63 -674.95,0.63 -716.61,42.28 -716.61,156.08 -677.69,195 -551.38,195 -516.38,160 -479.05,160 ; C1D.1@-659.05,-90.63 R6D.1@-659.05,-5.91 ; R6D.1@-658.73,0.31 R8D.2@-569.36,0.31 ; R5D.2@-570.9,-108.14 R5D.2@-572.76,-110 R5D.2@-566.85,-110 ; -570.9,-88.14 -570.9,-1.23 R8D.2@-569.36,0.31 ; R8D.2@-569.05,0.63 R8D.2@-569.36,0.31 ; R5D.2@-566.85,-90 -513.16,-143.69 -494.27,-143.69 -435.86,-202.1 -435.86,-227.63 U1D.6@-434.05,-229.44 -435.86,-231.25 U1D.6@-435.86,-256.78 ; TP2D.1@-479.05,220 -479.05,160 ; C2D.2@-400.07,142.44 -388.42,154.09 C2D.2@-388.42,160 -479.05,160